# Altium PCB High Power Brushed DC MC.PcbDoc (part 2 of 2)
Units mil, origin at the board's own origin, x right, y up, seen from the top; angles counter-clockwise.
Board outline 3543.31 x 3641.73 mil, 4 copper layers (Top Layer, Ground, Power, Bottom Layer), stack 72.868 mil thick; 81 components, 28 nets, 205 pads, 180 vias.
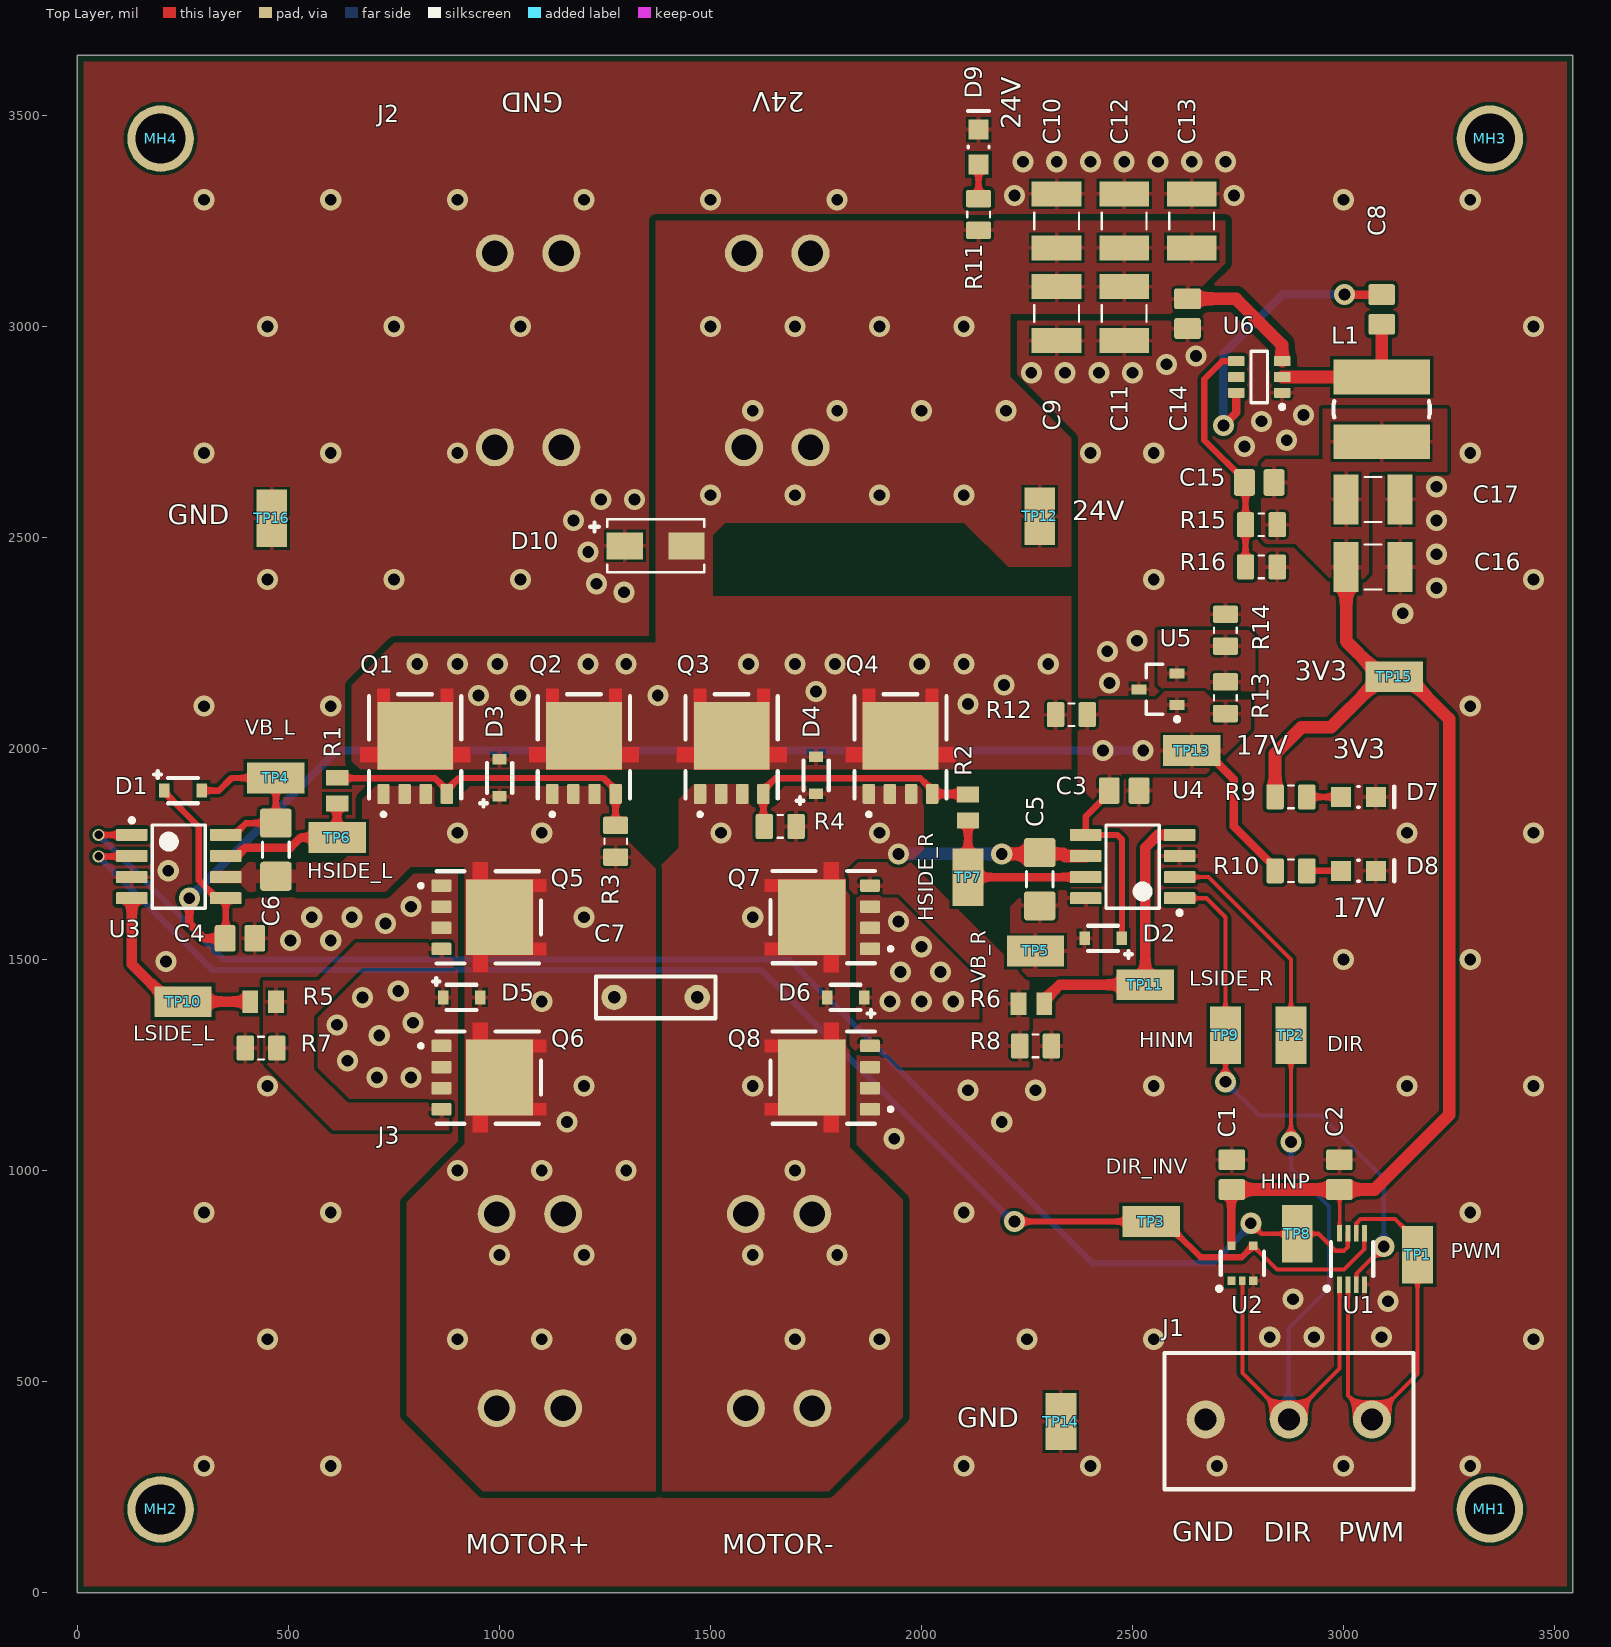
[diagram p0: Top Layer view]

## Via types
v1: diameter 50, hole 28, Top Layer to Bottom Layer, tented both sides, 178 vias
v2: diameter 28, hole 20, Top Layer to Bottom Layer, tented both sides, 2 vias

## Nets (pads, with @x,y where several pads share a name; then routed paths per layer and width w, separated by ;. In a path a pad name is that pad's centre, name@x,y a point inside that pad or via, vN(x,y) a via of type N, cw(c..) or ccw(c..) an arc to the next point about the centre after c; other vN are vias at no path point) (continued)
HIGH_SIDE_M: (continued)
  Top Layer w10: U4.1 2675,1645 2720,1600 TP9.1@2720,1315 ; v1(2720,1210) TP9.1@2720,1305 ; U1.3 3030.75,729.88 3030.75,755.75 v1(3095,820)
  Bottom Layer w10: v1(2720,1210) 2800,1130 2945.91,1130 3095,980.91 v1(3095,820)
HIGH_SIDE_P: TP8.1 U1.7 U3.1 | length 3573.4
  Top Layer w10: v1(2780,875) 2805,850 TP8.1 2890.13,849.87 2940.13,849.87 2980,810 3001.09,810 3009.88,818.79 3009.88,850.74 U1.7
  Top Layer w15: v2(50,1795) U3.1
  Bottom Layer w15: v2(50,1795) 345,1500 1685,1500 2405,780 2690,780 v1@2790,880
HSIDE_L: R1.1 TP6.1 U3.7 | length 362.7
  Top Layer w20: U3.7 355.39,1749.17 381.29,1749.17 397.12,1765 505,1765 528.83,1788.83 TP6.1@615,1788.83 ; R1.1 TP6.1@615,1788.83 ; TP6.1 TP6.1@615,1788.83
HSIDE_R: R2.2 TP7.1 U4.7 | length 413.3
  Top Layer w20: R2.2 TP7.1 U4.7
LSIDE_L: R5.1 TP10.1 U3.4 | length 473.6
  Top Layer w25: U3.4 128.78,1488.91 217.69,1400 R5.1
LSIDE_R: R6.2 TP11.1 U4.4 | length 681.4
  Top Layer w25: R6.2 2290.51,1402.87 2327.64,1440 TP11.1 2530,1765 2560,1795 U4.4
MOTOR_M: C5.1 C7.2 D4.1 D6.2 J3.2 Q3.1 Q4.1 Q7.3 Q8.3 R4.1 U4.6 | length 448.3
  Top Layer w30: v1(2190,1750) 2277.01,1750 C5.1 2282.99,1750 2335,1750 2340,1745 U4.6
  Bottom Layer w30: v1(1945,1750) v1(2190,1750)
  other v1: 1700,600 1900,600 1600,800 1800,800 1700,1000 1600,1200 1600,1600 1525,1800 1900,1800
MOTOR_P: C6.1 C7.1 D3.1 D5.2 J3.1 Q1.1 Q2.1 Q5.3 Q6.3 R3.2 U3.6
  other v1: 900,600 1100,600 1300,600 1000,800 1200,800 900,1000 1100,1000 1300,1000 1160,1115 1200,1200 1100,1400 1200,1600 900,1800 1100,1800
NetC8_1: C8.1 U6.6 | length 693.9
  Top Layer w20: v1(2715,2765) 2745.87,2795.87 U6.6 ; v1(3001.71,3075.77) 3002.24,3075.24 C8.1
  Bottom Layer w20: v1(2715,2765) 2715,2935 2855.77,3075.77 v1(3001.71,3075.77)
NetD7_1: D7.1 R9.1 | length 81.1
  Top Layer w15: R9.1 D7.1
NetD8_1: D8.1 R10.1 | length 81.1
  Top Layer w15: R10.1 D8.1
NetD9_1: D9.1 R11.1 | length 81.1
  Top Layer w15: R11.1 D9.1
NetQ1_2: Q1.2 Q2.2 R1.2 R3.1 | length 803.9
  Top Layer w15: R1.2@600,1930.51 R1.2 616.12,1929.39 847.01,1929.39 875,1901.4 Q1.2@875,1901.06 ; Q1.2 Q1.2@875,1901.06 ; R3.1 Q2.2 1267.74,1899.47 1267.74,1908.67 1246.4,1930 903.94,1930 Q1.2@875,1901.06
NetQ3_2: Q3.2 Q4.2 R2.1 R4.2 | length 603.6
  Top Layer w15: R4.2@1625,1815 1625,1901.06 1653.33,1929.39 1997.01,1929.39 2017.74,1908.67 2017.74,1899.47 Q4.2
  Top Layer w20: Q4.2 R2.1@2110,1892.2
NetQ5_2: Q5.2 Q6.2 R5.2 R7.1
NetQ7_2: Q7.2 Q8.2 R6.1 R8.2
NetR13_1: R13.1 R14.2 U5.2
PWM: J1.1 TP1.1 U1.2 U1.6 | length 1004.2
  Top Layer w10: U1.2 3010.16,466.69 J1.1 3175,518.15 3175,831.5 3143.58,862.91 3121.5,885 3040,885 3029.69,874.69 3029.69,851.18 U1.6
SW: C8.2 L1.2 U6.2 | length 360.6
  Top Layer w30: U6.2 L1.2 C8.2
pads on no net: MH1.0 MH2.0 MH3.0 MH4.0 U2.1 U6.5

## Polygon pours and split planes (outlines as drawn)
GND on Top Layer "GND_L01_P014" (solid, remove dead copper, pour order 14): 125,3800 0,3675 0,0 3615,0 3615,3800
24V on Top Layer "24V_L01_P011" (solid, pour order 11): 1370,3250 1370,2470 1370,2250 750,2250 650,2150 650,1970 670,1950 2355,1950 2355,2735 2210,2880 2210,3030 2590,3030 2650,3030 2660,3040 2660,3090 2720,3150 2720,3250
17V on Top Layer "17V_L01_P003" (solid, pour order 3): 2370,2115 2555.82,2115 2575.82,2135 2670,2135 2690,2115 2780,2115 2780,2045 2750,2015 2675,1940 2475,1940 2465,1930 2465,1870 2413.55,1870 2370,1913.55
3V3 on Top Layer "3V3_L01_P009" (solid, pour order 9): 3245,2805 2950,2805 2950,2685 2815,2685 2805,2675 2805,2495 2815,2485 2885,2485 2990,2380 3025,2380 3060,2415 3060,2650 3065,2655 3245,2655
MOTOR_M on Top Layer "MOTOR_M_L01_P013" (solid, pour order 13): 1375,240 1375,1715 1425,1765 1425,1880 1460,1915 1590,1915 1590,1870 1600,1860 1650,1860 1665,1875 1665,1900 1675,1910 2005,1910 2005,1760 1965,1720 1850.35,1720 1830,1699.65 1830,1055 1955,930 1955,415 1780,240
MOTOR_P on Top Layer "MOTOR_P_L01_P012" (solid, pour order 12): 780,420 960,240 1370,240 1370,1715 1260,1825 1260,1910 930,1910 905,1885 905,1860 850,1860 845,1865 845,1905 840,1910 705,1910 675,1880 675,1780 625,1730 405,1730 385,1710 320,1710 320,1680 385,1680 405,1660 730,1660 790,1720 917.8,1720 917.8,1062.8 780,925
BOOTSTRAP_R on Top Layer "BOOTSTRAP_R_L01_P000" (solid, pour order 0): 2419.34,1663.34 2326.17,1663.34 2312.83,1650 2235,1650 2210,1625 2210,1500 2251.14,1458.86 2419.34,1458.86
NetQ7_2 on Top Layer "NETQ7_2_L01_P001" (solid, pour order 1): 2255,1450 2255,1245 1950,1245 1920.24,1274.76 1852.11,1274.76 1830,1296.87 1830,1325 1855,1350 2145,1350 2145,1455 1945.76,1654.24 1840.76,1654.24 1825,1670 1825,1710 1830,1710 1850,1730 1975,1730 2005,1700
NetQ5_2 on Top Layer "NETQ5_2_L01_P010" (solid, pour order 10): 440,1260 605,1095 880,1095 880,1160 640,1160 560,1240 560,1365 675,1480 890,1480 890,1540 660,1540 570,1450 440,1450
NetR13_1 on Top Layer "NETR13_1_L01_P006" (solid, pour order 6): 2560,2280 2560,2150.82 2575.82,2135 2790,2135 2790,2265 2775,2280
24V on Power "24V_L03_P024" (solid, pour order 24): 0,0 0,3695 110,3805 3675,3805 3675,85 3590,0
MOTOR_M on Power "MOTOR_M_L03_P020" (solid, pour order 20): 1410,1930 1370,1890 1370,225 1780,225 1975,420 1975,940 1830,1085 1835,1090 1835,1680 1875,1720 1980,1720 2000,1740 2000,1930
MOTOR_P on Power "MOTOR_P_L03_P008" (solid, pour order 8): 715,1935 665,1885 665,1730 810,1730 910,1630 910,1060 765,915 765,430 970,225 1360,225 1360,1860 1285,1935
GND on Ground "GND_L02_P007" (solid, pour order 7): 0,0 0,3680 35,3715 3635,3715 3635,55 3580,0
GND on Bottom Layer "GND_L04_P025" (solid, pour order 25): 75,3725 0,3650 0,0 3650,0 3855,205 3865,205 3865,3490 3630,3725

## Other copper
Top Layer:
  pour cut-out: 2370,2360 1505,2360 1505,2505 1535,2535 2100,2535 2205,2430 2370,2430

## Silkscreen, mask and mechanical layers (free items; w line width, h text height)
Top Overlay:
  text "24V" at 1722.83,3570 h80 r180
  text "GND" at 1151.03,3569.06 h80 r180
  text "24V" at 2250,3467.17 h80 r90
  text "24V" at 2357.17,2525 h80
  text "GND" at 213.97,2515.94 h80
  text "3V3" at 2884.12,2145.94 h80
  text "VB_L" at 397.26,2020.59 h60
  text "17V" at 2744.12,1970 h80
  text "3V3" at 2974.12,1960.94 h80
  text "HSIDE_L" at 544.49,1680.59 h60
  text "HSIDE_R" at 2039.41,1590.9 h60 r90
  text "17V" at 2974.12,1585 h80
  text "VB_R" at 2164.41,1443.66 h60 r90
  text "LSIDE_R" at 2633.97,1425.59 h60
  text "LSIDE_L" at 132.56,1295.59 h60
  text "HINM" at 2515.33,1280 h60
  text "DIR" at 2960.98,1270 h60
  text "DIR_INV" at 2436.13,980.59 h60
  text "HINP" at 2804.1,945 h60
  text "PWM" at 3253.28,780 h60
  text "GND" at 2083.97,375.94 h80
  text "GND" at 2593.97,105.94 h80
  text "DIR" at 2811.23,105 h80
  text "PWM" at 2987.6,105 h80
  text "MOTOR+" at 919.89,75.94 h80
  text "MOTOR-" at 1527.66,75.94 h80
Mechanical 13:
  the board outline again, w10